# Altium PCB Motor Driver.PcbDoc
Units mil, origin at the board's own origin, x right, y up, seen from the top; angles counter-clockwise.
Board outline 1810 x 1800 mil, 4 copper layers (Top Layer, Signal Layer, GND, Bottom Layer), stack 23.756 mil thick; 43 components, 38 nets, 184 pads, 70 vias.
Unrouted connection lines stored in the file: 7.
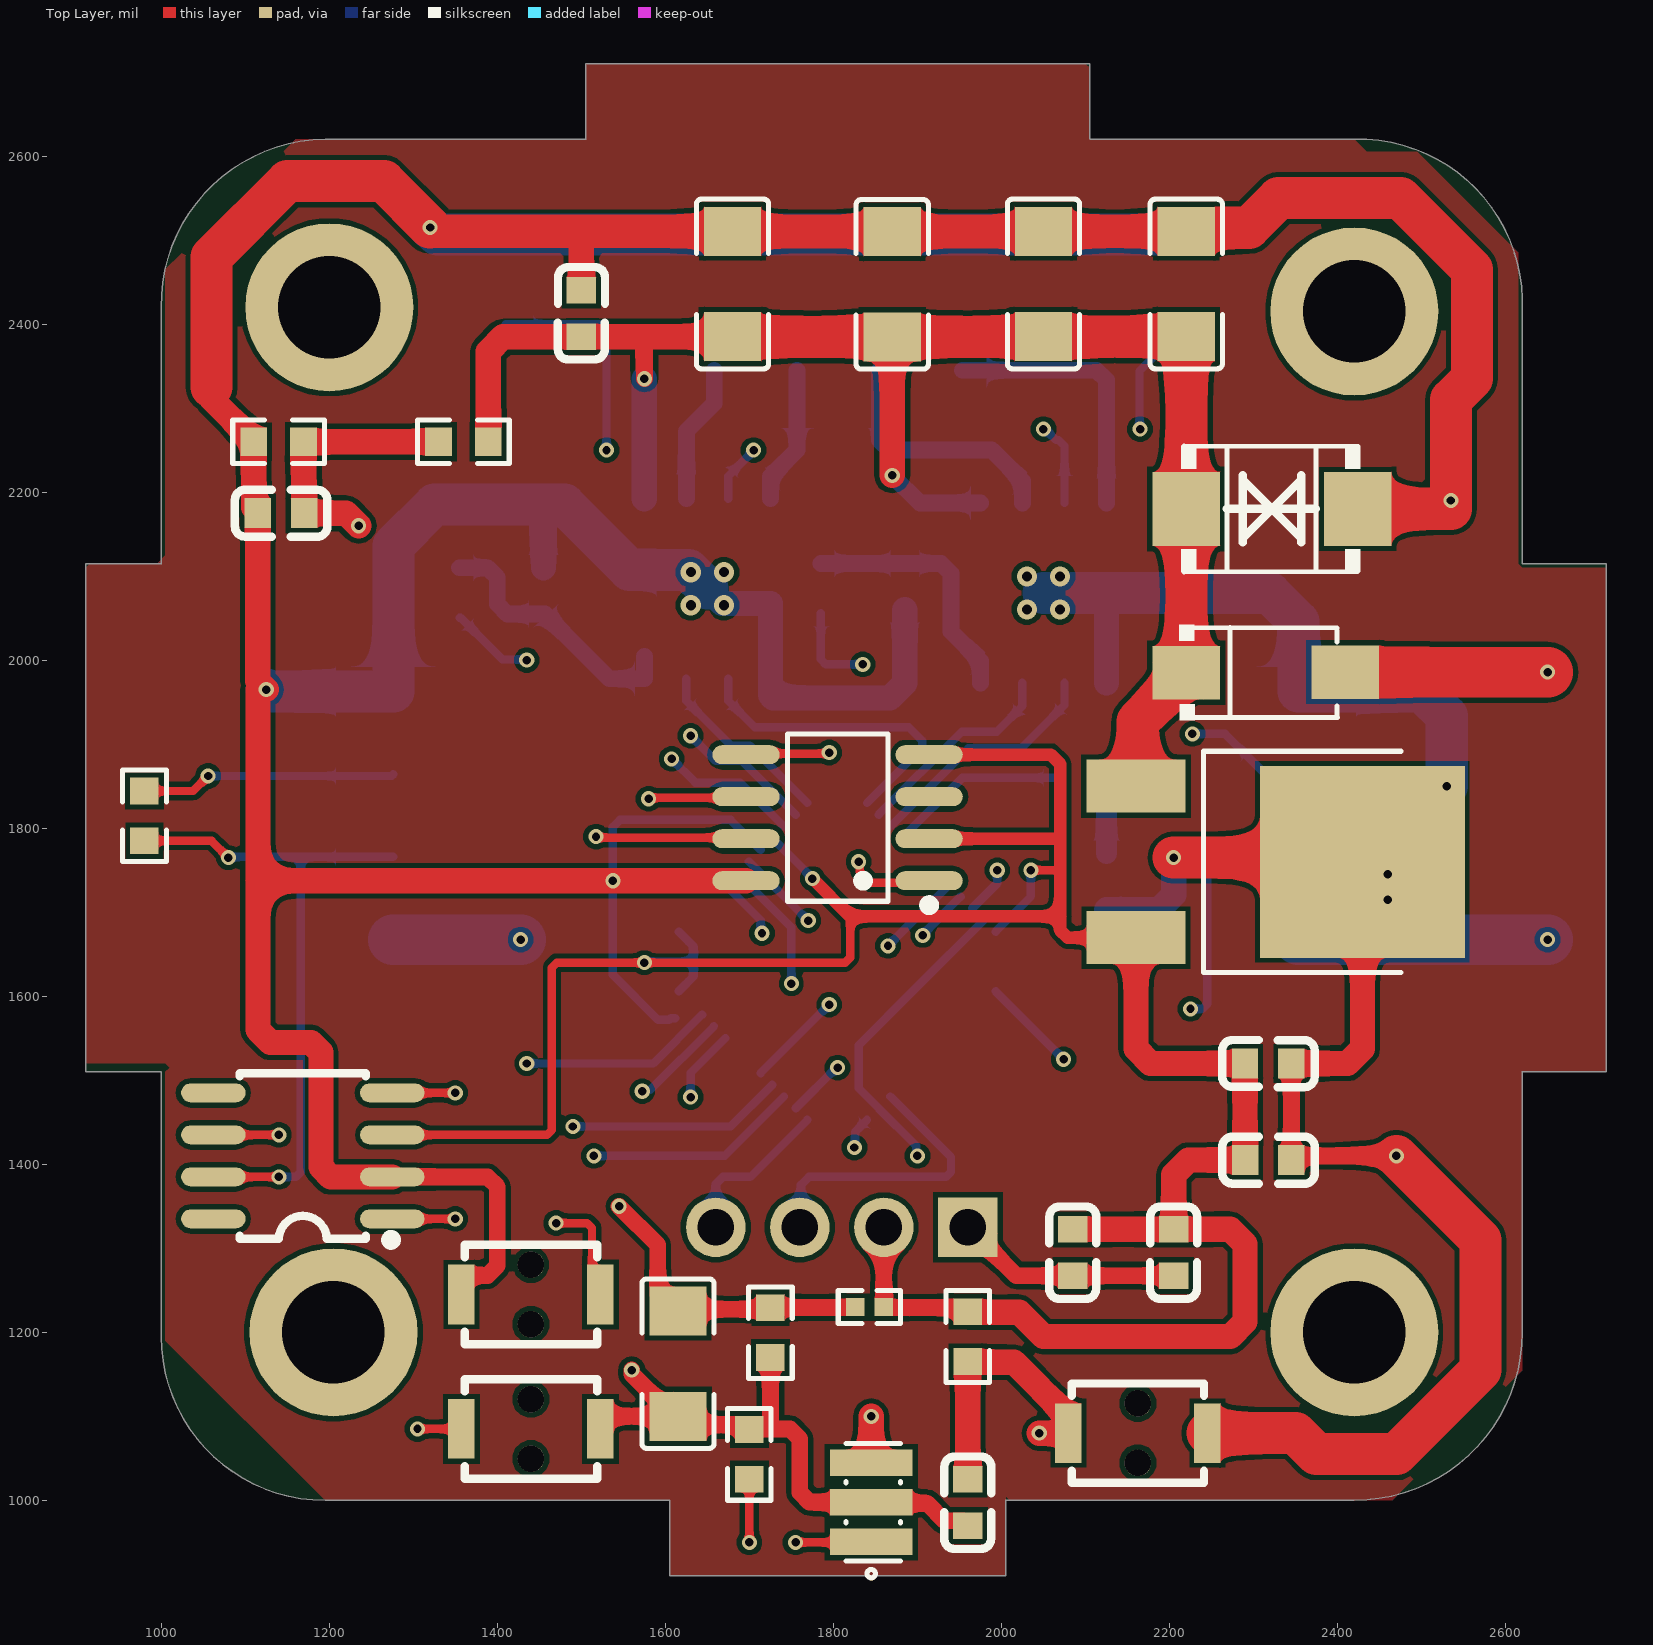
[diagram p0: Top Layer view]
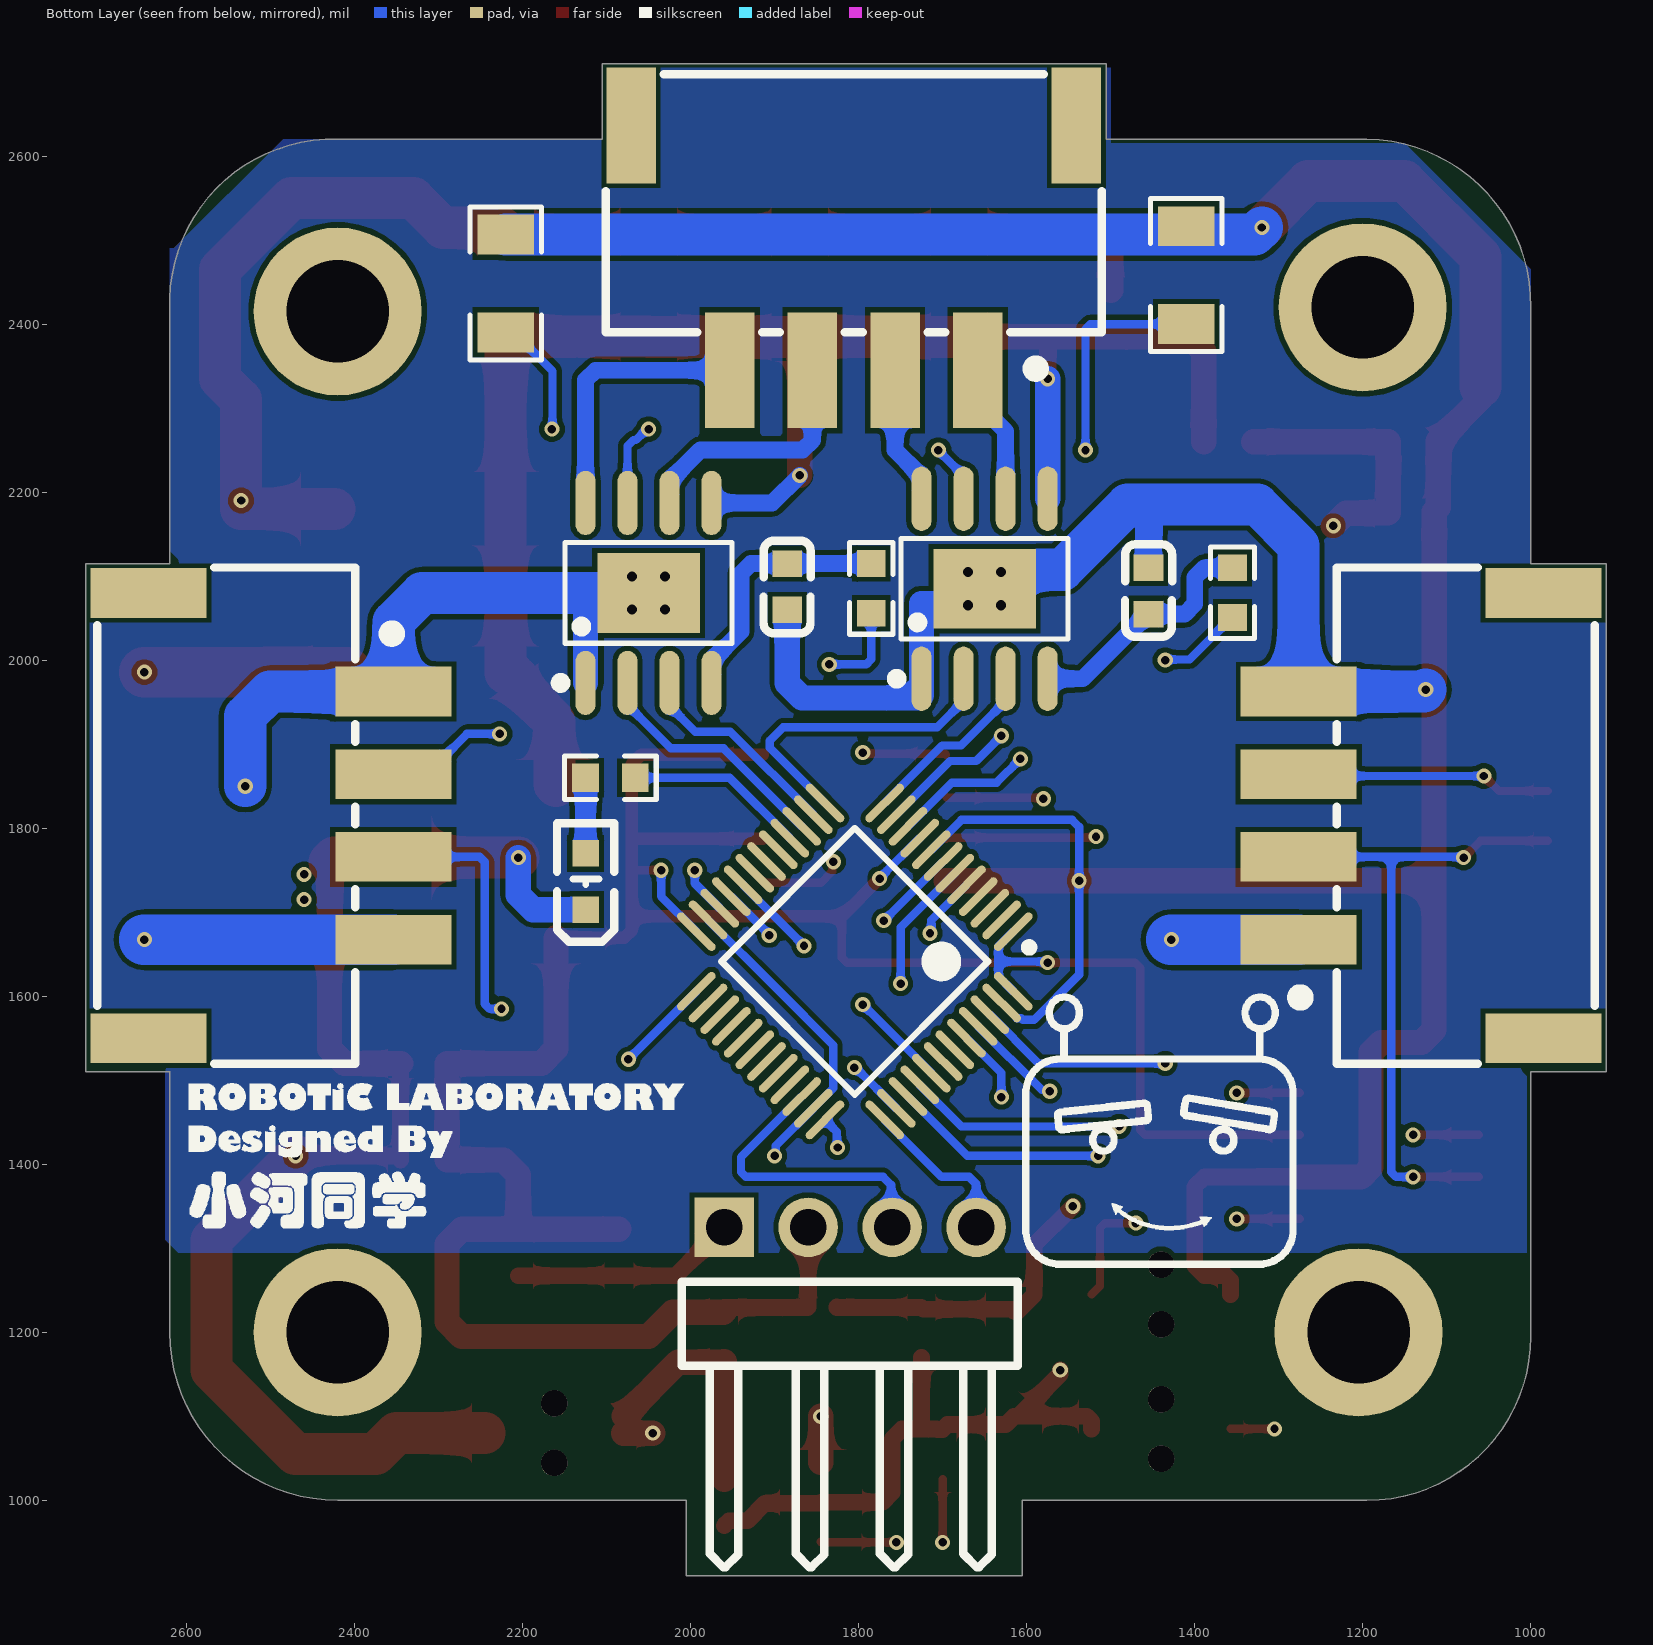
[diagram p1: Bottom Layer view, seen from below]
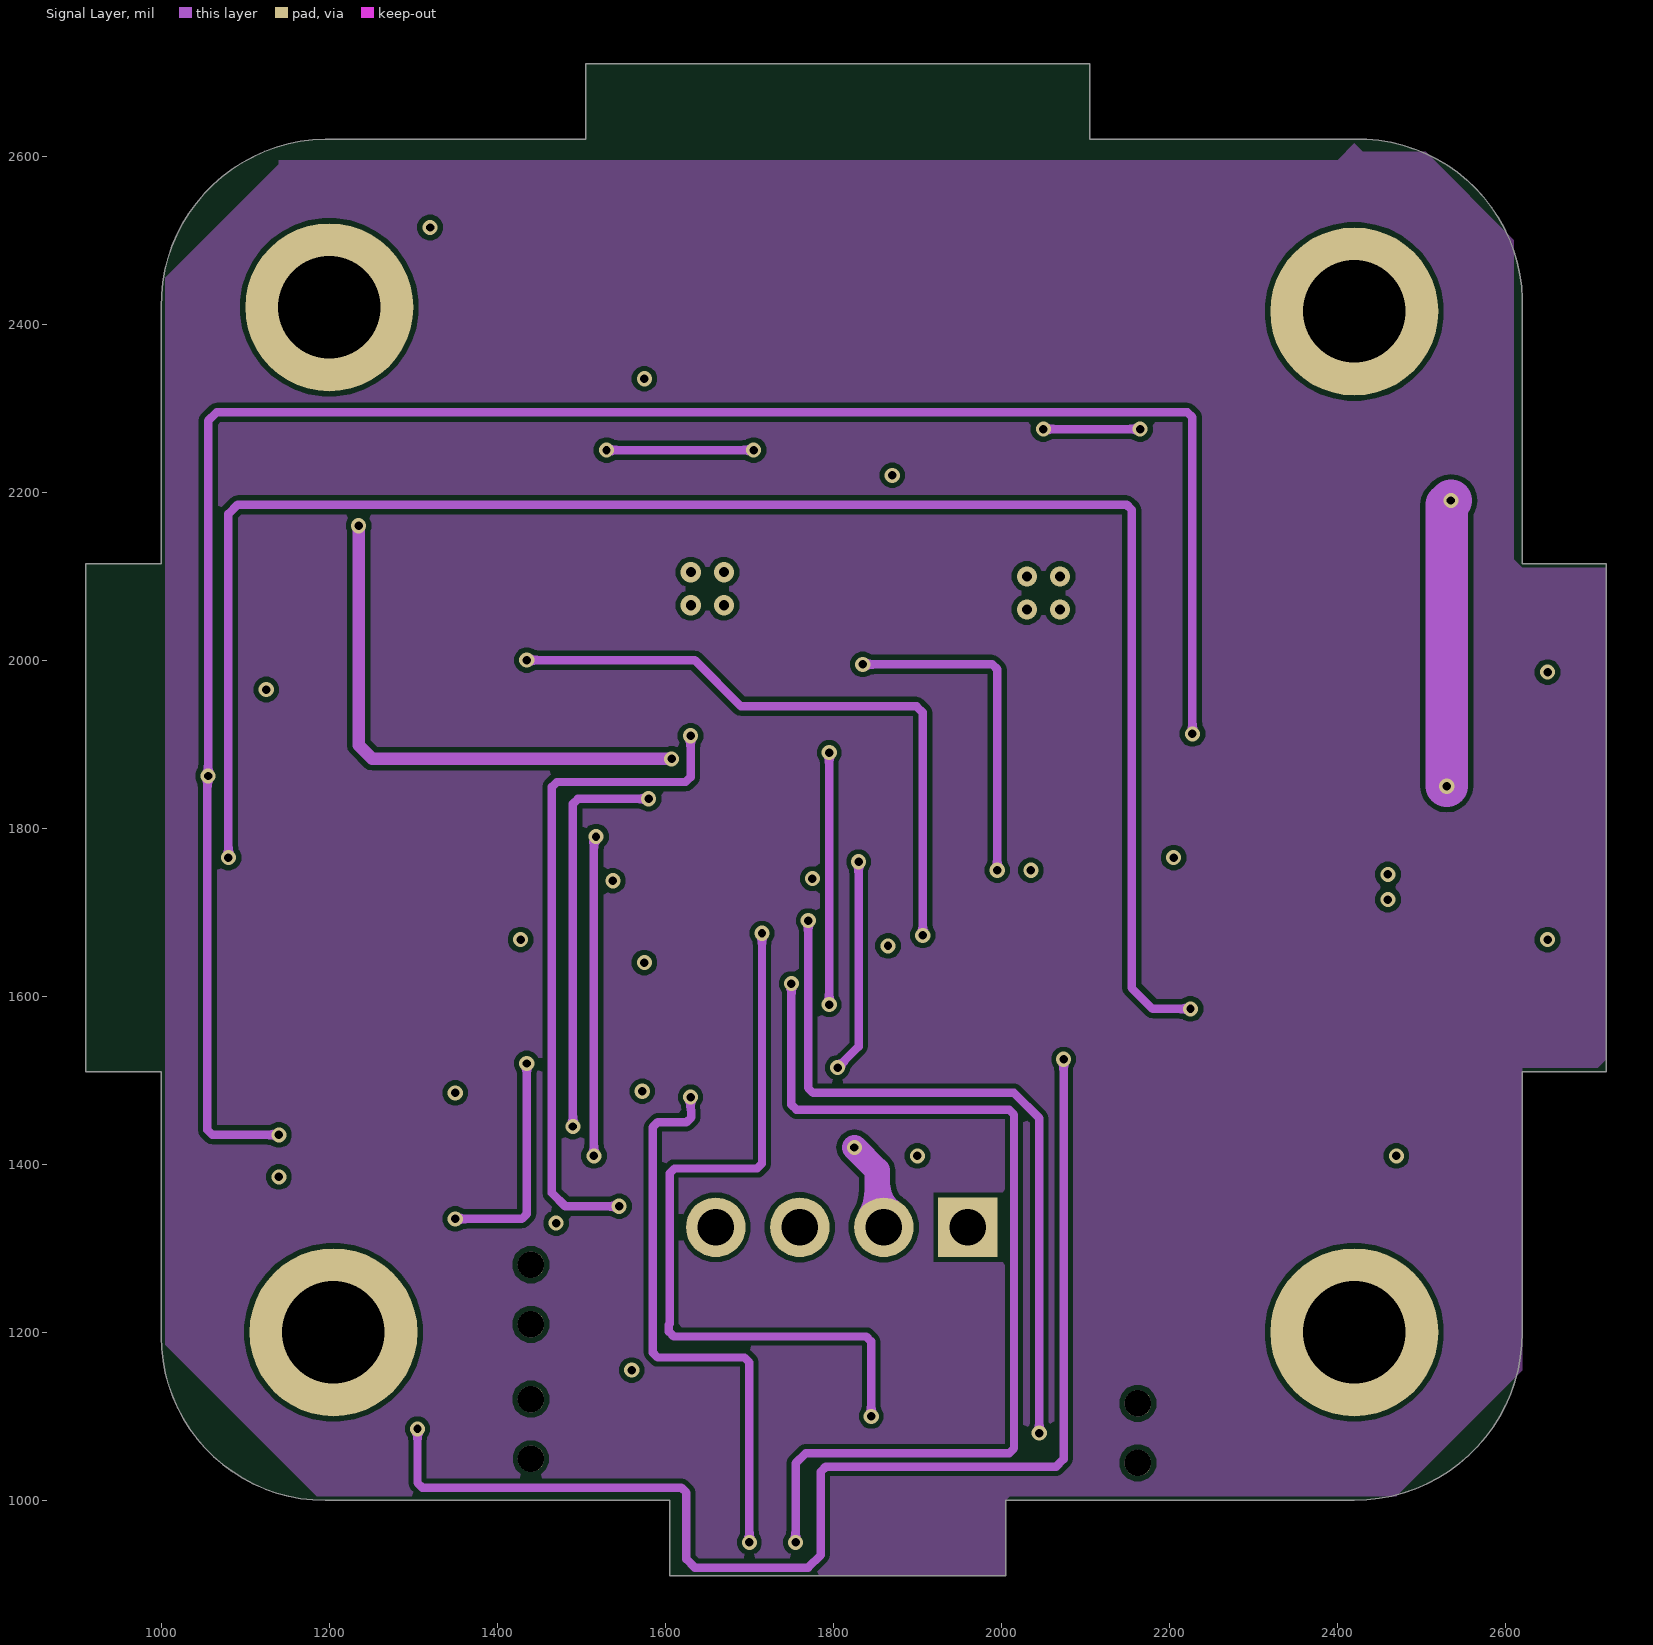
[diagram p2: Signal Layer]
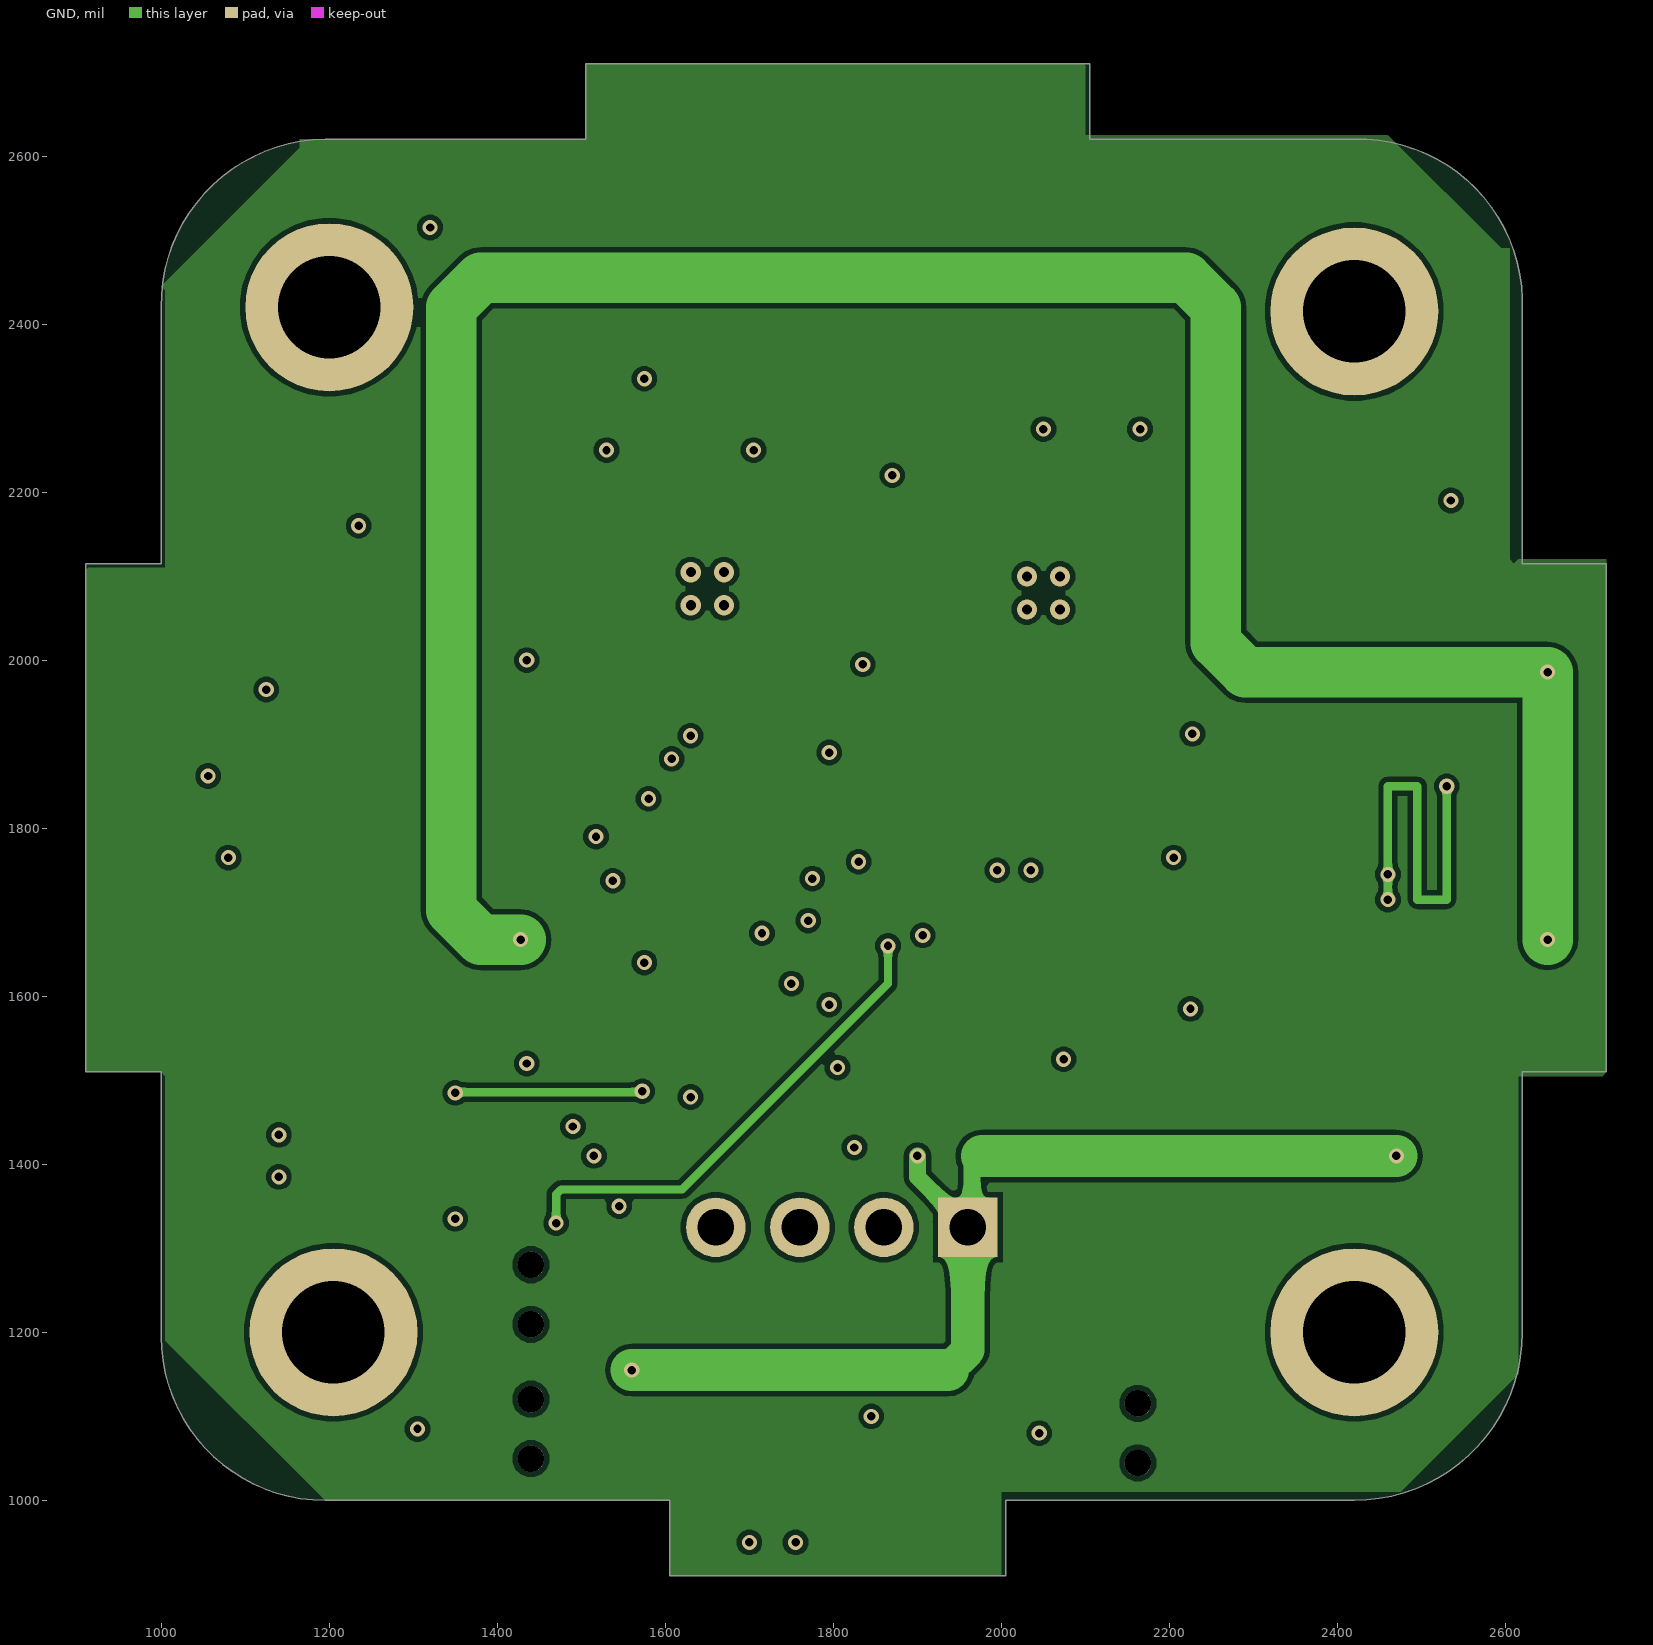
[diagram p3: GND]

## Layer stack, top to bottom
Top Solder: solder mask 0.4, Solder Resist, Dk 3.5
Top Layer: signal copper 1.4
Dielectric 2: prepreg 2.8, PP-006, Dk 4.1
Signal Layer: signal copper 1.378
Dielectric 1: dielectric 12.6, FR-4, Dk 4.8
GND: signal copper 1.378
Dielectric 3: prepreg 2.8, PP-006, Dk 4.1
Bottom Layer: signal copper 1.4
Bottom Solder: solder mask 0.4, Solder Resist, Dk 3.5

## Board outline
910,1510 1000,1510 1000,1195 ccw(c1195,1195) 1195,1000 1605,1000 1605,910 2005,910 2005,1000 2420,1000 ccw(c2420,1200) 2620,1200 2620,1510 2720,1510 2720,2115 2620,2115 2620,2430 ccw(c2425,2425) 2420,2620 2105,2620 2105,2710 1505,2710 1505,2620 1195,2620 ccw(c1197.5,2422.5) 1000,2420 1000,2115 910,2115

## Design rules (kind name [scope] priority, off if disabled: settings)
Clearance [All] p1: gap=6 ignorepadtopadclearanceinfootprint=FALSE
ComponentClearance [All] p1: gap=0 collisioncheckmode=3 verticalgap=0 showdistances=FALSE
HoleSize [All] p1: absolutevalues=TRUE maxlimit=10000 minlimit=8 maxpercent=80.000 minpercent=20.000
MinimumSolderMaskSliver [All] p1: minsoldermaskwidth=1
PolygonConnect [All] p1: connectstyle=Relief reliefconductorwidth=10 reliefentries=4 polygonreliefangle="90 Angle" airgapwidth=10
RoutingVias [All] p1: holewidth=28 width=50 viastyle="Through Hole" minholewidth=28 minwidth=50 maxholewidth=28 maxwidth=50
SilkToSilkClearance [All] p1: silktosilkclearance=0
SilkToSolderMaskClearance [IsPad] p1: minsilkscreentomaskgap=0 clearancetoexposedcopper=TRUE
SolderMaskExpansion [All] p1: expansion=4 istentingtop=FALSE
Width [All] p1: maxlimit=1000 minlimit=10 preferedwidth=10
25 further rules are at their usual default settings.

## Components (designator, comment, footprint, x,y, rotation, side; value= is the part's Value field where it differs from the comment)
C1 "100uF" C1206 2220,2447.7 r90 top
C2 "100uF" C1206 2050,2447.7 r90 top
C3 "100uF" C1206 1870,2447.3 r90 top
C4 "100uF" C1206 1680,2447.7 r90 top
C5 "100nF" C0603 1500,2412.55 r270 top
C6 "1uF" C0603 2317.44,1520 r180 top
C7 "1uF" C0603 2317.55,1405 r180 top
C8 "100nF" C0603 2205,1295 r90 top
C9 "100nF" C0603 2085,1295 r90 top
C14 "100nF" C0603 1885,2087.45 r90 bottom
C16 "100nF" C0603 1455,2082.44 r270 bottom
C18 "10uF" C1206 1615,1162.7 r90 top
C19 "100nF" C0603 1960,997.44 r90 top
C26 "100nF" C0603 1142.44,2175 r180 top
CN1 "" CONN-SMD_4P-P2.50-WAFER-254W-4P 1130.67,1815.04 r90 bottom
CN2 "" CONN-SMD_4P-P2.50-WAFER-254W-4P 2499.33,1815.04 r270 bottom
CN3 "" CONN-SMD_4P-P2.50-WAFER-254W-4P 1805.79,2490.67 r0 bottom
D1 "SS54" SMA_L4.3-W2.6-LS5.0-RD 2314.65,1985.37 r0 top
D2 "SMBJ28CA" SMB_L4.6-W3.6-LS5.3-BI 2322.02,2180 r180 top
H1 "" HDR-TH_4P-P2.54-H-M-W10.4 1810,1325 r180 bottom
LED1 "19-217/BHC-ZL1M2RY/3T" LED0603-R-RD_BLUE 2125,1736.5 r90 bottom
R4 "1K" R0603 1785,2085.35 r90 bottom
R6 "1K" R0603 1355,2080.35 r90 bottom
R8 "0.1" R1206 2220,2448.22 r90 bottom
R9 "0.1" R1206 1410,2458.22 r90 bottom
R10 "NTCThermistor" R0402 1842.96,1230 r180 top
R11 "3.3K" R0603_NEW 1725,1199.65 r90 top
R12 "10K" R0603 1700,1054.66 r90 top
R13 "10K" R0603 1960,1195 r90 top
R17 "120" R0603 980,1814.65 r90 top
R19 "10K" R0603 1359.65,2260 r180 top
R20 "1K" R0603 1139.65,2260 r180 top
R21 "1K" R0603 2095.35,1860 r180 bottom
SW1 "K2-1807UA-A4DW-06" KEY-SMD_L4.0-W2.9-L 2162.32,1080 r0 top
SW2 "K2-1807UA-A4DW-06" KEY-SMD_L4.0-W2.9-L 1440,1085 r0 top
SW3 "K2-1807UA-A4DW-06" KEY-SMD_L4.0-W2.9-L 1440,1245 r180 top
U1 "LP2950CDTX-3.3/NOPB" TO-252-2_L6.6-W6.1-P4.57-LS9.9-BR-CW 2294.8,1759.84 r180 top
U3 "A4950ELJTR-T" SOIC-8_L4.9-W3.9-P1.27-LS6.0-BL-EP 2050,2080 r180 bottom
U4 "A4950ELJTR-T" SOIC-8_L4.9-W3.9-P1.27-LS6.0-BL-EP 1650,2085 r180 bottom
U5 "STM32F103C8T6" STM-LQFP48_L 1804.51,1641.39 r315 bottom
U6 "SN65HVD232DR" SOIC-8_L5.0-W4.0-P1.27-LS6.0-BL 1168.5,1410 r90 top
U7 "MT6816CT-ACD" SOP-8_L5.0-W4.0-P1.27-LS6.0-BL 1805,1812.5 r90 top
X1 "12MHz" CRYSTAL-SMD_3P-L3.2-W1.3-P1.2-BL 1845,997.76 r90 top

## Footprints (in the part's own frame and the unit in brackets; to place one, negate y for a bottom-side part, rotate by r counter-clockwise, add the part's x,y. Pads: shape width x height; smd on the part's side, far side on the other; paste and mask are expansions set on the pad)
C0603 [mm]
  rect 0.8x0.9 smd: 1(-0.7,0) 2(0.7,0)
  silkscreen extent -1.41,-0.71 1.39,0.72
C1206 [mm]
  rect 1.485x1.728 smd: 1(-1.593,0) 2(1.593,0)
  silkscreen extent -2.56,-1.09 2.56,1.09
CONN-SMD_4P-P2.50-WAFER-254W-4P [mm]
  rect 1.5x3.5 smd: 1(-3.75,3.7) 2(-1.25,3.7) 3(1.25,3.7) 4(3.75,3.7) 5(-6.73,-3.7) 6(6.73,-3.7)
  silkscreen extent -7.5,-5.25 7.5,3.85
CRYSTAL-SMD_3P-L3.2-W1.3-P1.2-BL [mm]
  rect 0.8x2.5 smd: 1(-1.2,0) 2(0,0) 3(1.2,0)
  silkscreen extent -2.29,-0.89 1.78,0.76
HDR-TH_4P-P2.54-H-M-W10.4 [mm]
  rect 1.8x1.8 hole 1.1: 1(-3.81,0)
  round 1.8 hole 1.1: 2(-1.27,0) 3(1.27,0) 4(3.81,0)
  silkscreen extent -5.09,-10.27 5.07,-1.65
KEY-SMD_L4.0-W2.9-L [mm]
  rect 0.8x1.8 smd: 1(-2.1,0) 2(2.1,0)
  round 0.8 hole 0.8 unplated: ""(0,-0.9) ""(0,0.9)
  silkscreen extent -2,-1.5 2,1.5
LED0603-R-RD_BLUE [mm]
  rect 0.8x0.8 smd: 1(0.851,0) 2(-0.851,0)
  silkscreen extent -1.82,-0.86 1.77,0.86
R0402 [mm]
  rect 0.566x0.54 smd: 1(-0.433,0) 2(0.433,0)
  silkscreen extent -0.94,-0.5 0.94,0.5
R0603 [mil]
  rect 31.75x34.02 smd: 1(-29.66,0) 2(29.65,0)
  silkscreen extent -55,-26 55,26
R0603_NEW [mil]
  rect 31.75x34.02 smd: 1(-29.65,0) 2(29.66,0)
  silkscreen extent -55,-26 55,26
R1206 [mil]
  rect 47.54x66.97 smd: 1(-58.22,0) 2(58.22,0)
  silkscreen extent -91,-42 91,42
SMA_L4.3-W2.6-LS5.0-RD [mm]
  rect 2.046x1.62 smd: 1(-2.404,-0.009) 2(2.404,0.009)
  silkscreen extent -2.61,-1.44 2.16,1.44
SMB_L4.6-W3.6-LS5.3-BI [mil]
  rect 80.61x88.23 smd: 1(-102.02,0) 2(102.02,0)
  silkscreen extent -105,-75 108,75
SOIC-8_L4.9-W3.9-P1.27-LS6.0-BL-EP [mm]
  oval 0.602x1.941 smd: 1(-1.905,-2.72) 2(-0.635,-2.72) 3(0.635,-2.72) 4(1.905,-2.72) 5(1.905,2.72) 6(0.635,2.72) 7(-0.635,2.72) 8(-1.905,2.72)
  rect 3.098x2.41 smd: 9(0,0)
  silkscreen extent -2.81,-2.87 2.53,1.52
SOIC-8_L5.0-W4.0-P1.27-LS6.0-BL [mil]
  oval 22.38x76.78 smd: 1(-75,-106.5) 2(-25,-106.5) 3(25,-106.5) 4(75,-106.5) 5(75,106.5) 6(25,106.5) 7(-25,106.5) 8(-75,106.5)
  silkscreen extent -106,-111 98,75
SOP-8_L5.0-W4.0-P1.27-LS6.0-BL [mil]
  oval 22.6x80.14 smd: 1(-75,-108.97) 2(-25,-108.97) 3(25,-108.97) 4(75,-108.97) 5(75,108.97) 6(25,108.97) 7(-25,108.97) 8(-75,108.97)
  silkscreen extent -110,-115 99,60
STM-LQFP48_L [mm] "QFP, 48-Leads, Body 7x7mm, Pitch 0.5mm, IPC High Density"
  oval 1.55x0.25 smd: 1(-4.025,2.75) 2(-4.025,2.25) 3(-4.025,1.75) 4(-4.025,1.25) 5(-4.025,0.75) 6(-4.025,0.25) 7(-4.025,-0.25) 8(-4.025,-0.75) 9(-4.025,-1.25) 10(-4.025,-1.75) 11(-4.025,-2.25) 12(-4.025,-2.75) 25(4.025,-2.75) 26(4.025,-2.25) 27(4.025,-1.75) 28(4.025,-1.25) 29(4.025,-0.75) 30(4.025,-0.25) 31(4.025,0.25) 32(4.025,0.75) 33(4.025,1.25) 34(4.025,1.75) 35(4.025,2.25) 36(4.025,2.75)
  oval 0.25x1.55 smd: 13(-2.75,-4.025) 14(-2.25,-4.025) 15(-1.75,-4.025) 16(-1.25,-4.025) 17(-0.75,-4.025) 18(-0.25,-4.025) 19(0.25,-4.025) 20(0.75,-4.025) 21(1.25,-4.025) 22(1.75,-4.025) 23(2.25,-4.025) 24(2.75,-4.025) 37(2.75,4.025) 38(2.25,4.025) 39(1.75,4.025) 40(1.25,4.025) 41(0.75,4.025) 42(0.25,4.025) 43(-0.25,4.025) 44(-0.75,4.025) 45(-1.25,4.025) 46(-1.75,4.025) 47(-2.25,4.025) 48(-2.75,4.025)
  silkscreen extent -4.15,-2.85 2.85,3.55, body extent -3.5,-3.5 3.5,3.5, height 1.6
TO-252-2_L6.6-W6.1-P4.57-LS9.9-BR-CW [mm]
  rect 3x1.6 smd: 1(3.424,-2.29) 3(3.424,2.29)
  rect 6.2x5.8 smd: 2(-3.424,0)
  silkscreen extent -4.58,-3.35 1.38,3.35

## Part data
C1 C2 C3 C4: BOM_JLCPCB Part Class="Extended Part", BOM_Manufacturer="Murata Electronics", BOM_Manufacturer Part=GRM31CR61A107ME05L, BOM_Supplier=LCSC, BOM_Supplier Part=C312983, Contributor=LCSC, nameAlias=Capacitance, spicePre=C, spiceSymbolName=GRM31CR61A107ME05L
C5 C8 C9 C14 C16 C19 C26: BOM_JLCPCB Part Class="Extended Part", BOM_Manufacturer=SAMSUNG, BOM_Manufacturer Part=CL10B104KB8NNNC, BOM_Supplier=LCSC, BOM_Supplier Part=C1591, nameAlias=Capacitance, spicePre=C, spiceSymbolName=CL10B104KB8NNNC
C6 C7: BOM_JLCPCB Part Class="Basic Part", BOM_Manufacturer=SAMSUNG, BOM_Manufacturer Part=CL10A105KB8NNNC, BOM_Supplier=LCSC, BOM_Supplier Part=C15849, nameAlias=Capacitance, spicePre=C, spiceSymbolName=CL10A105KB8NNNC
C18: BOM_JLCPCB Part Class="Basic Part", BOM_Manufacturer=SAMSUNG, BOM_Manufacturer Part=CL31A106KBHNNNE, BOM_Supplier=LCSC, BOM_Supplier Part=C13585, nameAlias=Capacitance, spicePre=C, spiceSymbolName=CL31A106KBHNNNE
CN1 CN2 CN3: library part WAFER-254W-4P, BOM_JLCPCB Part Class="Extended Part", BOM_Manufacturer=XUNPU(讯普), BOM_Manufacturer Part=WAFER-254W-4P, BOM_Supplier=LCSC, BOM_Supplier Part=C2856745, Contributor=LCSC, spicePre=C, spiceSymbolName=WAFER-254W-4P
D1: library part SS54_C727065, BOM_JLCPCB Part Class="Extended Part", BOM_Manufacturer=TWGMC, BOM_Manufacturer Part=SS54, BOM_Supplier=LCSC, BOM_Supplier Part=C727065, Contributor=LCSC, spicePre=D, spiceSymbolName=SS54_C727065
D2: library part SMBJ28CA_C908204, BOM_JLCPCB Part Class="Extended Part", BOM_Manufacturer=FUXINSEMI, BOM_Manufacturer Part=SMBJ28CA, BOM_Supplier=LCSC, BOM_Supplier Part=C908204, Contributor=LCSC, spicePre=D, spiceSymbolName=SMBJ28CA_C908204
H1: library part 2.54-1*4P反弯排针, BOM_JLCPCB Part Class="Extended Part", BOM_Manufacturer=BOOMELE(博穆精密), BOM_Manufacturer Part=2.54-1*4P反弯排针, BOM_Supplier=LCSC, BOM_Supplier Part=C91552, Contributor=LCSC, spicePre=H, spiceSymbolName=2.54-1*4P反弯排针
LED1: BOM_JLCPCB Part Class="Basic Part", BOM_Manufacturer=EVERLIGHT, BOM_Manufacturer Part=19-217/BHC-ZL1M2RY/3T, BOM_Supplier=LCSC, BOM_Supplier Part=C72041, spicePre=L, spiceSymbolName=19-217/BHC-ZL1M2RY/3T
R4 R6 R20 R21: BOM_JLCPCB Part Class="Basic Part", BOM_Manufacturer=UniOhm, BOM_Manufacturer Part=0603WAF1001T5E, BOM_Supplier=LCSC, BOM_Supplier Part=C21190, nameAlias="Resistance (Ohms)", spicePre=R, spiceSymbolName=0603WAF1001T5E
R8 R9: BOM_JLCPCB Part Class="Basic Part", BOM_Manufacturer=UniOhm, BOM_Manufacturer Part=1206W4F100LT5E, BOM_Supplier=LCSC, BOM_Supplier Part=C25334, nameAlias="Resistance (Ohms)", spicePre=R, spiceSymbolName=1206W4F100LT5E
R10: BOM_JLCPCB Part Class="Extended Part", BOM_Manufacturer=MuRata, BOM_Manufacturer Part=NCP15XH103F03RC, BOM_Supplier=LCSC, BOM_Supplier Part=C77131, nameAlias=Value, spicePre=R, spiceSymbolName=NCP15XH103F03RC
R11: BOM_JLCPCB Part Class="Basic Part", BOM_Manufacturer=UniOhm, BOM_Manufacturer Part=0603WAF3301T5E, BOM_Supplier=LCSC, BOM_Supplier Part=C22978, nameAlias="Resistance (Ohms)", spicePre=R, spiceSymbolName=0603WAF3301T5E
R12 R13 R19: BOM_JLCPCB Part Class="Basic Part", BOM_Manufacturer=UniOhm, BOM_Manufacturer Part=0603WAF1002T5E, BOM_Supplier=LCSC, BOM_Supplier Part=C25804, nameAlias="Resistance (Ohms)", spicePre=R, spiceSymbolName=0603WAF1002T5E
R17: BOM_JLCPCB Part Class="Basic Part", BOM_Manufacturer=UniOhm, BOM_Manufacturer Part=0603WAF1200T5E, BOM_Supplier=LCSC, BOM_Supplier Part=C22787, nameAlias="Resistance (Ohms)", spicePre=R, spiceSymbolName=0603WAF1200T5E
SW1 SW2 SW3: BOM_JLCPCB Part Class="Extended Part", BOM_Manufacturer="Korean Hroparts Elec", BOM_Manufacturer Part=K2-1807UA-A4DW-06, BOM_Supplier=LCSC, BOM_Supplier Part=C502307, Contributor=LCSC, spicePre=S, spiceSymbolName=K2-1807UA-A4DW-06
U1 U6: BOM_JLCPCB Part Class="Extended Part", BOM_Manufacturer=TI, BOM_Supplier=LCSC, spicePre=U
  U1: BOM_Manufacturer Part=LP2950CDTX-3.3/NOPB, BOM_Supplier Part=C129994, Contributor=LCSC, spiceSymbolName=LP2950CDTX-3.3/NOPB
  U6: BOM_Manufacturer Part=SN65HVD232DR, BOM_Supplier Part=C30530, spiceSymbolName=SN65HVD232DR
U3 U4: BOM_JLCPCB Part Class="Extended Part", BOM_Manufacturer=ALLEGRO, BOM_Manufacturer Part=A4950ELJTR-T, BOM_Supplier=LCSC, BOM_Supplier Part=C82404, spicePre=U, spiceSymbolName=A4950ELJTR-T
U5: library part CMP-0237-00215-3, "ARM Cortex-M3 32-bit MCU, 64 KB Flash, 20 KB Internal RAM, 37 I/Os, 48-pin LQFP, -40 to 85 degC, Tray", I/Os (High Current)=37, Operating Frequency(F) (Processor speed) (MHz)=72, Supply Voltage(Vcc) min (V)=2, A/D Converter="2x12-bit (10 Channel)", ComponentLink1Description="Manufacturer URL", ComponentLink1URL=http://www.st.com/web/en/home.html, ComponentLink2Description=Datasheet, ComponentLink2URL=http://www.st.com/st-web-ui/static/active/en/resource/technical/document/datasheet/CD00161566.pdf, ComponentLink3Description="Package Specification", ComponentLink3URL=http://www.st.com/st-web-ui/static/active/en/resource/technical/document/datasheet/DM00058181.pdf, Core="ARM Cortex-M3", DatasheetVersion="Rev. 16", FLASH Size (Prog) (kB)=64, Internal RAM Size (kB)=20, Mounting Technology="Surface Mount", PackageDescription="48-Pin Low Profile Quad Flat Package, 7 x 7 mm Body, 0.5 mm Pitch", PackageReference=LQFP48, PackageVersion="Rev. 6, 06/2013", Packing=Tray, PartNumber=STM32F103C8T6
U7: BOM_JLCPCB Part Class="Extended Part", BOM_Manufacturer="Magn Tek", BOM_Manufacturer Part=MT6816CT-ACD, BOM_Supplier=LCSC, BOM_Supplier Part=C879560, Contributor=LCSC, spicePre=U, spiceSymbolName=MT6816CT-ACD
X1: BOM_JLCPCB Part Class="Extended Part", BOM_Manufacturer=muRata(村田), BOM_Manufacturer Part=CSTNE12M0G52A000R0, BOM_Supplier=LCSC, BOM_Supplier Part=C907957, Contributor=LCSC, nameAlias=Frequency, spicePre=X, spiceSymbolName=CSTNE12M0G52A000R0

## Free pads (board coordinates)
  round 200 hole 122: GND(1200,2420) GND(1205,1200) GND(2420,1200) GND(2420,2415)

## Via types
v1: diameter 18, hole 10, Top Layer to Bottom Layer, 62 vias
v2: diameter 24, hole 12, Top Layer to Bottom Layer, 8 vias

## Nets (pads, with @x,y where several pads share a name; then routed paths per layer and width w, separated by ;. In a path a pad name is that pad's centre, name@x,y a point inside that pad or via, vN(x,y) a via of type N, cw(c..) or ccw(c..) an arc to the next point about the centre after c; other vN are vias at no path point)
"Blue LED": R21.2 U5.16 | length 213.7
  Bottom Layer w10: U5.16 1953.52,1860 R21.2
BUTTON_1: SW2.1 U5.25 | length 1675.5
  Top Layer w10: v1(1305,1085) SW2.1
  Signal Layer w10: v1(1305,1085) 1305,1020.86 1310.86,1015 1619.14,1015 1625,1009.14 1625,930 1635,920 1770,920 1785,935 1785,1034.14 1790.86,1040 2065,1040 2074.02,1049.02 v1(2074.02,1525)
  Bottom Layer w10: U5.25 v1(2074.02,1525)
BUTTON_2: SW3.1 U5.20 | length 809
  Top Layer w10: v1(1470,1330) 1506.78,1330 1512.64,1324.14 1512.64,1255.03 SW3.1
  GND w10: v1(1470,1330) 1470,1364.14 1475.86,1370 1620,1370 1865,1615 v1(1865,1660)
  Bottom Layer w10: v1(1865,1660) 1865,1660.13 U5.20
CAN_H: CN1.2 CN2.3 R17.1 U6.7 | length 3229.6
  Top Layer w10: R17.1 1060,1785 v1(1080,1765) ; U6.7 v1(1140,1385)
  Signal Layer w10: v1(1080,1765) 1080,2174.14 1090.86,2185 2149.14,2185 2155,2179.14 2155,1610 2180,1585 v1(2225,1585)
  Bottom Layer w10: v1(1080,1765) 1080.83,1765.83 1166.08,1765.83 ; v1(1140,1385) 1160.22,1385 1166.08,1390.86 1166.08,1765.83 ; CN1.2 1166.08,1765.83 ; v1(2225,1585) 2239.14,1585 2245,1590.86 2245,1759.97 2250.86,1765.83 CN2.3
CAN_L: CN1.3 CN2.2 R17.2 U6.6 | length 3015.6
  Top Layer w10: R17.2 1037.97,1844.31 v1(1055.79,1862.13) ; U6.6 v1(1140,1435)
  Signal Layer w10: v1(1140,1435) 1060.86,1435 1055,1440.86 1055,1861.34 v1(1055.79,1862.13) 1055.79,2284.93 1065.86,2295 2221.44,2295 2227.3,2289.14 v1(2227.3,1912.3)
  Bottom Layer w10: v1(1055.79,1862.13) 1274.21,1862.13 CN1.3 ; v1(2227.3,1912.3) 2266.25,1912.3 2314.29,1864.25 CN2.2
CAN_RX: U5.45 U6.4 | length 415.4
  Top Layer w10: U6.4 v1(1350,1485)
  GND w10: v1(1350,1485) 1350.94,1485.94 1571.61,1485.94 v1(1572.55,1486.88)
  Bottom Layer w10: v1(1572.55,1486.88) 1574.08,1488.41 1581.92,1488.41 U5.45
CAN_TX: U5.46 U6.1 | length 574.4
  Top Layer w10: U6.1 v1(1350,1335)
  Signal Layer w10: v1(1350,1335) 1429.14,1335 1435,1340.86 v1(1435,1520)
  Bottom Layer w10: v1(1435,1520) 1585.68,1520 U5.46
GND: C1.2 C2.2 C3.2 C4.2 C5.1 C6.1 C7.1 C8.1 C9.1 C14.1 C16.1 C18.1 C19.1 C26.2 CN1.4 CN2.1 D2.1 H1.1 LED1.2 R8.2 R9.2 R11.1 R12.2 R20.2 SW1.2 SW2.2 SW3.2 U1.2 U3.1 U3.9 U4.1 U4.9 U5.8 U5.23 U5.35 U5.47 U6.2 U7.8 X1.2 | length 12663.2
  Top Layer w20: U6.2 1388.28,1385 1400,1373.28 1400,1279.36 1388.28,1267.64 1363.07,1267.64 1357.32,1261.9 SW3.2 ; SW2.2 1522.68,1094.25 1528.43,1100 C18.1 ; v1(1560,1155) 1560,1150.22 1610.22,1100 C18.1 ; R11.1 1725,1087.65 1727.65,1085 ; C19.1 1954.25,975.64 1932.34,975.64 1911.31,996.67 1846.08,996.67 X1.2 1771.72,997.76 1760,1009.47 1760,1073.28 1748.28,1085 1727.65,1085 ; H1.1 2017.56,1267.44 C9.1 C8.1 ; C6.1 2345.05,1519.94 2345.05,1405.06 C7.1 2350.11,1410 v1(2470,1410) ; C18.1 1624.81,1090.19 1694.12,1090.19 R12.2 1706.32,1084.31 1707.01,1085 1727.65,1085
  Top Layer w30: 1060,2325 1060,2311.13 1110,2261.13 R20.2 1110,2181.86 1114.89,2176.97 C26.2 1114.89,1975.11 v1(1125,1965) ; 1115,1965 1115,1737.5 ; U6.2 1201.72,1385 1190,1396.72 1190,1533.28 1178.28,1545 1130,1545 1115,1560 1115,1737.5 ; C5.1 1500,2508.09 1502.3,2510.39 ; U7.8 1115,1737.5 ; C6.1 2412.03,1520 2429.61,1537.57 U1.2
  Top Layer w40: v1(1320,2515) 1324.61,2510.39 1502.3,2510.39 C4.2 1680.2,2510.2 1869.8,2510.2 C3.2 1870.2,2510.2 2049.8,2510.2 C2.2 C1.2
  Top Layer w50: 1060,2325 1060,2480 1150,2570 1265,2570 v1(1320,2515) ; v1(2205,1765) 2424.45,1765 U1.2 ; C1.2 2224.23,2514.63 2294.63,2514.63 2330,2550 2475,2550 2560,2465 2560,2335 2535,2310 v1(2535,2190) 2535,2180 D2.1 ; SW1.2 2350,1080 2375,1055 2470,1055 2570,1155 2570,1310 v1(2470,1410)
  Signal Layer w50: v1(2530,1850) 2530,2185 v1(2535,2190)
  GND w10: v1(2460,1715) v1(2460,1745) 2460,1850 2495,1850 2495,1715 2530,1715 v1(2530,1850)
  GND w20: v1(1900,1410) 1900,1385 H1.1 1965,1330 1965,1398.28 1976.72,1410
  GND w40: 1936.57,1155 1960,1178.43 H1.1
  GND w50: v1(1560,1155) 1936.57,1155 ; 1976.72,1410 v1(2470,1410)
  Bottom Layer w10: U5.47@1611.72,1573.99 1606.51,1573.99 1604.4,1571.88 1591.21,1571.88 1537.5,1625.59 1537.5,1801.64 1545.86,1810 1677.66,1810 U5.8 ; v1(1900,1410) 1898.47,1411.53 1898.47,1422.15 U5.35 1853.92,1466.81 1830,1490.73 1830,1541.61 1897.3,1608.91 U5.23
  Bottom Layer w30: C16.1 1455,2185 ; U4.9 1667.57,2067.43 1725,2067.43 U4.1 1725,1958.15 1728.15,1955 1867.43,1955 1885,1972.57 C14.1 ; LED1.2 2187.43,1703 2205,1720.57 v1(2205,1765) ; U3.1 2125,2075 2130,2080
  Bottom Layer w50: v1(1125,1965) 1127.32,1962.68 CN1.4 1276.34,2136.34 1325,2185 1455,2185 1480,2185 1557.56,2107.44 1627.56,2107.44 U4.9 ; v1(1320,2515) 1328.56,2506.44 R8.2 ; U3.9 2130,2080 2319.37,2080 2353.66,2045.71 CN2.1 2500.71,1962.68 2530,1933.39 v1(2530,1850)
  other v1: 1537.5,1737.5
  other v2: 2030.31,2060.31 2069.68,2060.31 1630.31,2065.31 1669.68,2065.31 2030.31,2099.68 2069.68,2099.68 1630.31,2104.68 1669.68,2104.68
IN_AM: U3.2 U5.15 | length 293.3
  Bottom Layer w10: U5.15 1960.68,1895 2023.46,1895 2075,1946.54 U3.2
IN_AP: U3.3 U5.14 | length 252.1
  Bottom Layer w10: U5.14 1952.84,1915 1994.48,1915 2025,1945.52 U3.3
IN_BM: U4.2 U5.13 | length 378.3
  Bottom Layer w10: U4.2 1675,1951.54 1706.54,1920 1890,1920 1904.39,1905.61 1905.86,1904.14 1905.86,1895.86 U5.13
IN_BP: U4.3 U5.12 | length 220.7
  Bottom Layer w10: U4.3 1625,1951.54 1678.06,1898.48 1700.53,1898.48 U5.12
IN_PWM_A: R4.1 U5.22 | length 566.4
  Signal Layer w10: v1(1835,1995) 1989.14,1995 1995,1989.14 v1(1995,1750)
  Bottom Layer w10: R4.1 1785,2000.86 1790.86,1995 v1(1835,1995) ; U5.22 1995,1734.45 v1(1995,1750)
IN_PWM_B: R6.1 U5.21 | length 928.2
  Signal Layer w10: v1(1435,2000) 1635,2000 1690,1945 1899.14,1945 1906.35,1937.79 v1(1906.35,1672.5)
  Bottom Layer w10: R6.1 1356.13,2050.69 1406,2000.82 1434.18,2000.82 v1(1435,2000) ; v1(1906.35,1672.5) 1906.35,1673.53 1951.36,1718.53 U5.21
MT6816_CS: U5.38 U7.1 | length 426.5
  Top Layer w10: v1(1830,1760) 1831.53,1758.47 1831.53,1748.47 1845,1735 1873.79,1735 1873.88,1735.09 1911.56,1735.09 U7.1
  Signal Layer w10: v1(1805,1515) 1830,1540 v1(1830,1760)
  Bottom Layer w10: U5.38 1755.2,1466.7 1803.5,1515 v1(1805,1515)
NetC19_2: C19.2 R13.1 SW1.1 U5.7 | length 1284.5
  Top Layer w30: C19.2 R13.1 1961.13,1165.35 1962.01,1164.47 2014.86,1164.47 SW1.1@2078.9,1100.43 ; v1(2045,1080) SW1.1
  Signal Layer w10: v1(1770,1690) 1770,1490.86 1775.86,1485 2015,1485 2045,1455 v1(2045,1080)
  Bottom Layer w10: U5.7 1699.51,1760.4 1769.91,1690 v1(1770,1690)
NetLED1_1: LED1.1 R21.1 | length 90
  Bottom Layer w25: LED1.1 R21.1
NetR8_1: R8.1 U3.7 | length 360.2
  Signal Layer w10: v1(2050,2275) v1(2165,2275)
  Bottom Layer w10: v1(2050,2275) 2052.16,2275 2065.09,2262.07 2067.93,2262.07 2075,2255 U3.7 ; v1(2165,2275) 2164.29,2275.71 2164.29,2344 2210.29,2390 R8.1
NetR9_1: R9.1 U4.7 | length 511.9
  Signal Layer w10: v1(1530,2250) v1(1705,2250)
  Bottom Layer w10: R9.1 1524.14,2400 1530,2394.14 v1(1530,2250) ; U4.7 1675,2219.23 1705,2249.23 v1(1705,2250)
NetR12_1: R12.1 U5.44 | length 840
  Top Layer w10: v1(1700,950) R12.1
  Signal Layer w10: v1(1630,1480) 1630,1465.02 1630.88,1464.14 1630.88,1455.86 1625.02,1450 1590.86,1450 1585,1444.14 1585,1175.86 1590.86,1170 1694.14,1170 1700,1164.14 v1(1700,950)
  Bottom Layer w10: v1(1630,1480) 1630,1508.64 U5.44
NetU5_5: U5.5 X1.3 | length 1043
  Top Layer w30: X1.3 v1(1845,1100)
  Signal Layer w10: v1(1715,1675) 1715,1400.86 1709.14,1395 1610.86,1395 1605,1389.14 1605,1210 1604.14,1209.14 1604.14,1200.86 1610,1195 1839.14,1195 1845,1189.14 v1(1845,1100)
  Bottom Layer w10: U5.5 1713.47,1690.67 1713.47,1676.53 v1(1715,1675)
NetU5_6: U5.6 X1.1 | length 1421.2
  Top Layer w10: v1(1755,950) 1844.49,950 X1.1
  Signal Layer w10: v1(1750,1615) 1750,1470.86 1755.86,1465 2009.14,1465 2015,1459.14 2015,1061.86 2009.14,1056 1766.86,1056 1755,1044.14 v1(1755,950)
  Bottom Layer w10: U5.6 1750,1681.98 v1(1750,1615)
OUT_A+: CN3.3 U3.6 | length 299.6
  Bottom Layer w20: CN3.3 1855,2261.72 1866.72,2250 1988.46,2250 2025,2213.46 U3.6
OUT_A-: CN3.4 U3.8 | length 322.6
  Bottom Layer w20: CN3.4 2113.28,2345 2125,2333.28 U3.8
OUT_B+: CN3.1 U4.6 | length 166.6
  Bottom Layer w20: U4.6 1625,2272.48 1658.15,2305.63 CN3.1
OUT_B-: CN3.2 U4.8 | length 166
  Bottom Layer w20: U4.8 1725,2218.46 1756.58,2250.04 CN3.2
POWER_U: C26.1 R19.2 R20.1 U5.10 | length 1124.6
  Top Layer w30: v1(1235,2160) 1220,2175 C26.1 1169.65,2175.34 1169.65,2259.66 R20.1 R19.2
  Signal Layer w15: v1(1235,2160) 1235,1898.79 1251.29,1882.5 v1(1607.5,1882.5)
  Bottom Layer w10: v1(1607.5,1882.5) 1635.73,1854.27 1689.06,1854.27 U5.10
SPI1_MISO: U5.40 U7.6 | length 851.4
  Top Layer w10: v1(1580,1835) 1581.25,1836.25 1694.78,1836.25 U7.6
  Signal Layer w10: v1(1490,1445) 1490,1829.14 1495.86,1835 v1(1580,1835)
  Bottom Layer w10: v1(1490,1445) 1677.71,1445 U5.40
SPI1_MOSI: U5.41 U7.5 | length 515.4
  Top Layer w10: U7.5 1697.28,1888.75 1793.75,1888.75 v1(1795,1890)
  Signal Layer w10: v1(1795,1590) v1(1795,1890)
  Bottom Layer w10: U5.41 1763.47,1558.6 1794.87,1590 v1(1795,1590)
SPI1_SCK: U5.39 U7.7 | length 816
  Top Layer w10: v1(1517.5,1790) 1518.75,1788.75 1694.78,1788.75 U7.7
  Signal Layer w10: v1(1515,1410) 1515,1782.84 1515.97,1783.8 1515.97,1788.47 v1(1517.5,1790)
  Bottom Layer w10: v1(1515,1410) 1670.55,1410 U5.39
SWCLK: H1.4 U5.37 | length 192.2
  Bottom Layer w10: H1.4 1660,1376.71 1668.29,1385 1701.23,1385 U5.37
SWDIO: H1.3 U5.34 | length 355.7
  Bottom Layer w10: H1.3 1761.29,1326.29 1761.29,1375.43 1770.86,1385 1934.14,1385 1940,1390.86 1940,1408.46 U5.34
TEMP: C18.2 R10.2 R11.2 U5.11 | length 1322.1
  Top Layer w20: v1(1545,1350) 1590.98,1304.02 1590.98,1244.63 1610.22,1225.39 C18.2 1616.96,1227.35 1723.04,1227.35 R11.2 1725.35,1229.65 1825.58,1229.65 R10.2
  Signal Layer w10: v1(1545,1350) 1480.86,1350 1465,1365.86 1465,1849.14 1470.86,1855 1624.14,1855 1630,1860.86 v1(1630,1910)
  Bottom Layer w10: v1(1630,1910) 1660,1880 1691.17,1880 U5.11
VCC: C1.1 C2.1 C3.1 C4.1 C5.2 D1.1 D2.2 R19.1 U1.1 U3.5 U4.5 | length 1986.6
  Top Layer w20: v1(1575,2335) 1575,2385
  Top Layer w30: R19.1 1389.31,2367.43 1406.88,2385 C5.2 1575,2385 C4.1 ; v1(1870,2220) C3.1
  Top Layer w50: C4.1 1680.2,2384.8 1869.8,2384.8 C3.1 1870.2,2384.8 2049.8,2384.8 C2.1 C1.1 D2.2 D1.1 2211.61,1985 2204.72,1978.11 2204.72,1969.72 2162.21,1927.21 2162.21,1852.21 U1.1
  Bottom Layer w20: v1(1870,2220) 1902.89,2187.11 U3.5
  Bottom Layer w30: U4.5 v1(1575,2335)
VCC_3V3: C6.2 C7.2 C8.2 C9.2 H1.2 R10.1 R13.2 U1.3 U5.1 U5.9 U5.24 U5.36 U5.48 U6.3 U7.2 U7.4 | length 3597.8
  Top Layer w10: U6.3 1459.14,1435 1465,1440.86 1465,1634.14 1470.86,1640 v1(1575,1640) 1814.14,1640 1820,1645.86 1820,1695 ; v1(2035,1750) 2070,1750
  Top Layer w15: v1(1775,1740) 1820,1695 2070,1695 ; U7.2 2067.5,1787.5 2070,1790 ; U7.4 2058.71,1887.5 2070,1876.21 2070,1790 ; U1.3 2078.79,1669.69 2070,1678.47 2070,1695 ; 2070,1695 2070,1750 2070,1790
  Top Layer w20: H1.2 R10.1 1860.63,1229.37 1955.29,1229.37 R13.2
  Top Layer w30: R13.2 1960.88,1223.78 2021.22,1223.78 2050,1195 2272.43,1195 2290,1212.57 2290,1304.98 2272.43,1322.56 C8.2 ; C9.2 C8.2 ; U1.3 2160,1537.57 2177.57,1520 C6.2 2289.94,1519.94 2289.94,1405.06 C7.2 2222.57,1405 2205,1387.43 C8.2
  Signal Layer w30: v1(1825,1420) 1852.18,1392.82 1852.18,1332.82 H1.2
  Bottom Layer w10: v1(1575,1640) 1576.39,1641.39 1633.88,1641.39 ; U5.48 1633.88,1623.88 1633.88,1641.39 ; U5.1 1633.88,1658.9 1633.88,1641.39 ; U5.9 1775,1740.49 v1(1775,1740) ; v1(1825,1420) 1825.8,1420.8 1825.8,1438.59 U5.36 ; U5.24 2035,1718.77 v1(2035,1750)
VCC_IN: CN1.1 CN2.4 D1.2 | length 3569
  Top Layer w60: D1.2 v1(2650,1985.74)
  GND w60: v1(1427.75,1667.4) 1380.15,1667.4 1345,1702.55 1345,2419.85 1380.15,2455 2219.85,2455 2255,2419.85 2255,2020.89 2290.15,1985.74 v1(2650,1985.74) v1(2650,1667.4)
  Bottom Layer w60: CN1.1 v1(1427.75,1667.4) ; CN2.4 v1(2650,1667.4)
VREF_A: C14.2 R4.2 U3.4 | length 304.7
  Bottom Layer w20: R4.2 C14.2 1928.28,2115 1940,2103.28 1940,2034.25 1975,1999.25 U3.4
VREF_B: C16.2 R6.2 U4.4 | length 320
  Bottom Layer w20: R6.2 1388.28,2110 1400,2098.28 1400,2066.72 1411.72,2055 1454.89,2055 C16.2 1456.97,2054.89 1462.72,2049.14 1462.72,2048.33 1533.15,1977.89 U4.4 U4.4@1575,2004.25
pads on no net: CN1.5 CN1.6 CN2.5 CN2.6 CN3.5 CN3.6 SW1. SW2. SW3. U5.2 U5.3 U5.4 U5.17 U5.18 U5.19 U5.26 U5.27 U5.28 U5.29 U5.30 U5.31 U5.32 U5.33 U5.42 U5.43 U6.5 U6.8 U7.3

## Polygon pours and split planes (outlines as drawn)
no net on Top Layer "NONET_L01_P000" (solid, pour order 0): 915,2115 910,2110 910,1520 1005,1520 1010,1515 1005,1510 1005,1190 1195,1000 1605,1000 1605,910 2005,910 2005,1005 2010,1000 2465,1000 2620,1155 2620,1510 2720,1510 2720,2110 2620,2110 2615,2115 2615,2485 2495,2605 2435,2605 2420,2620 2105,2620 2105,2705 2100,2710 1505,2710 1505,2620 1160,2620 1005,2465 1005,2125 995,2115
no net on Signal Layer "NONET_L02_P001" (solid, pour order 1): 1140,2595 1140,2590 1005,2455 1005,1185 1185,1005 1600,1005 1600,915 1605,910 2005,910 2005,1000 2010,1005 2470,1005 2620,1155 2620,1515 2710,1515 2720,1525 2720,2110 2620,2110 2610,2120 2610,2500 2505,2605 2430,2605 2420,2615 2400,2595
no net on GND "NONET_L03_P002" (solid, pour order 2): 1165,2620 1505,2620 1505,2710 2105,2710 2100,2705 2100,2625 2460,2625 2595,2490 2605,2490 2605,2120 2610,2115 2615,2120 2720,2120 2720,1510 2715,1505 2615,1505 2615,1150 2475,1010 2000,1010 2000,910 1605,910 1605,1000 1195,1000 1005,1190 1005,1505 1000,1510 910,1510 910,2115 915,2110 1005,2110 1005,2440 1000,2445 1165,2610
no net on Bottom Layer "NONET_L04_P004" (solid, pour order 4): 910,2100 910,1525 995,1525 1010,1510 1005,1505 1005,1295 2610,1295 2625,1310 2625,1510 2720,1510 2715,1515 2715,2120 2610,2120 2620,2130 2620,2490 2615,2490 2485,2620 2100,2620 2100,2695 2090,2705 1500,2705 1500,2615 1150,2615 1000,2465 1000,2120 930,2120

## Silkscreen, mask and mechanical layers (free items; w line width, h text height)
Bottom Overlay:
  drawing of 108 lines, arcs and shapes, not listed
Mechanical 1:
  lines w5: 1000,1195 1000,1510 910,1510 910,2115 1000,2115 1000,2420 ; 1195,1000 1605,1000 1605,910 2005,910 2005,1000 2420,1000 ; 1195,2620 1505,2620 1505,2710 2105,2710 2105,2620 2420,2620 ; 2620,1200 2620,1510 2720,1510 2720,2115 2620,2115 2620,2395
  lines w10: 1000,1195 ccw(c1195,1195) 1195,1000 ; 1000,2420 cw(c1197.5,2422.5) 1195,2620 ; 2420,1000 ccw(c2420,1200) 2620,1200 ; 2420,2620 cw(c2425,2425) 2620,2430 2620,2395